# Altium PCB AD9837Final.PcbDoc
Units mm, origin at the board's own origin, x right, y up, seen from the top; angles counter-clockwise.
Board outline 23.2 x 28.1 mm, 2 copper layers (Top Layer, Bottom Layer); 12 components, 11 nets, 51 pads, 5 vias.
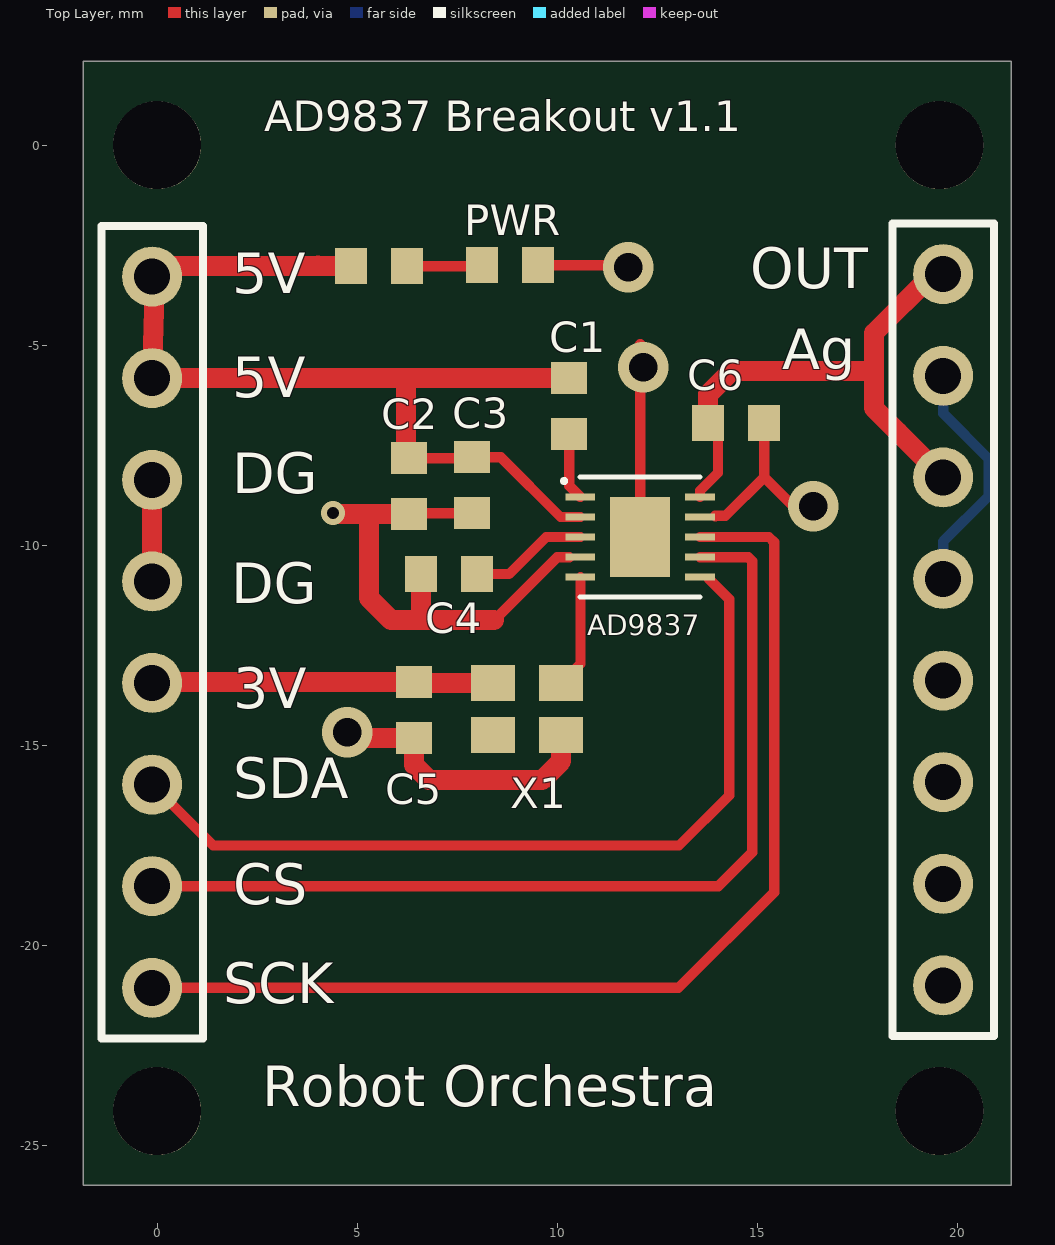
[diagram p0: Top Layer view]
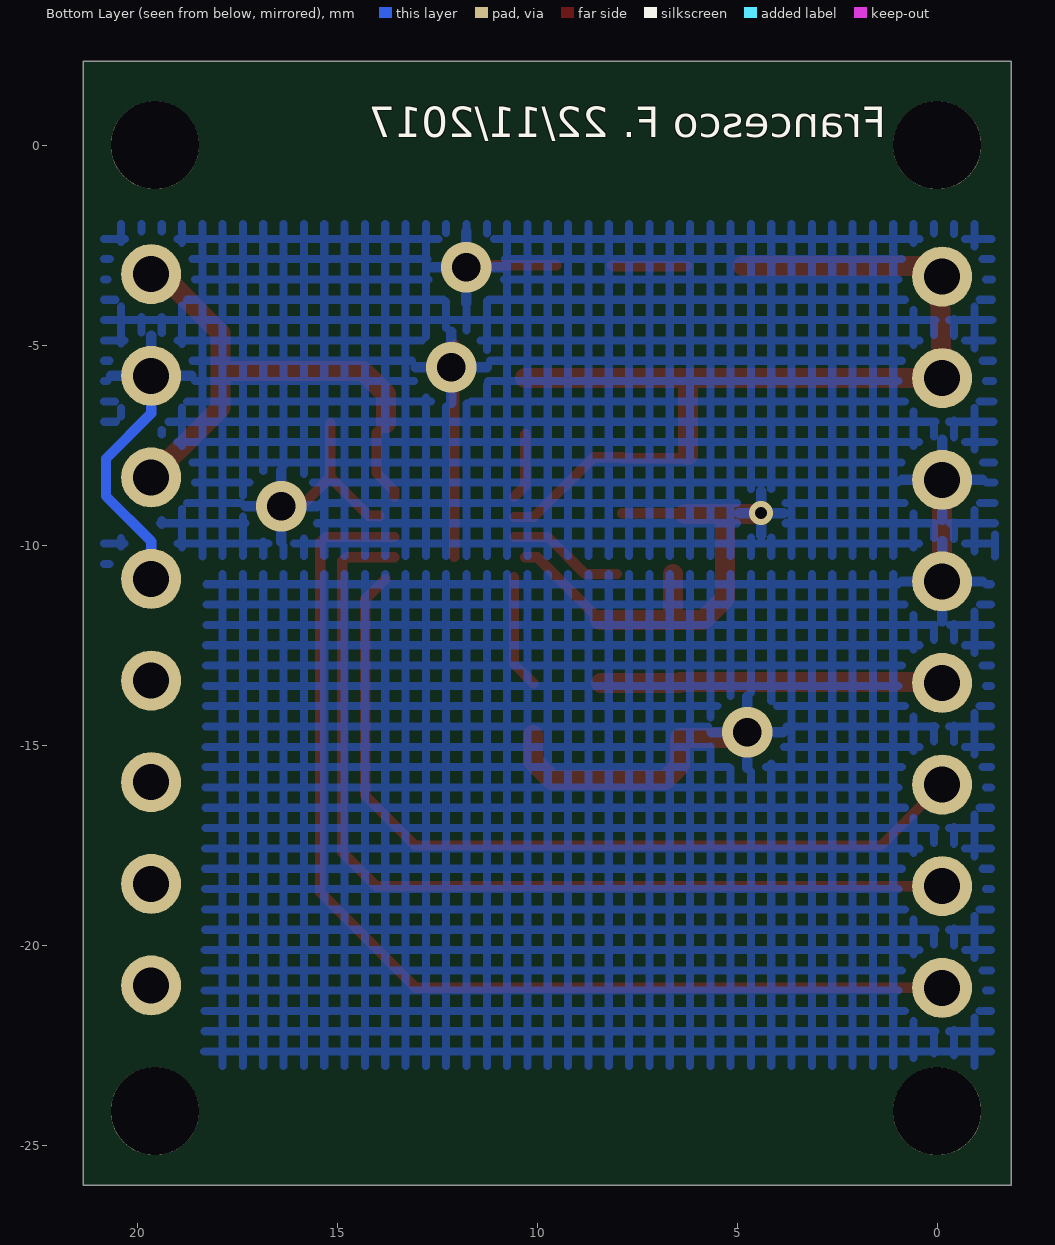
[diagram p1: Bottom Layer view, seen from below]

## Layer stack, top to bottom
Top Solder: solder mask 0.0102, Solder Resist, Dk 3.5
Top Layer: signal copper 0.0356
Dielectric 1: dielectric 0.32, FR-4, Dk 4.8
Bottom Layer: signal copper 0.0356
Bottom Solder: solder mask 0.0102, Solder Resist, Dk 3.5

## Board outline
-1.85,2.1 -1.85,-26 21.35,-26 21.35,2.1

## Design rules (kind name [scope] priority, off if disabled: settings)
Clearance [All] p1: gap=0.25
PolygonConnect [All] p1: connectstyle=Relief reliefconductorwidth=0.254 reliefentries=4 polygonreliefangle="90 Angle" airgapwidth=0.254
RoutingVias [All] p1: holewidth=0.711 width=1.27 viastyle="Through Hole" minholewidth=0.711 minwidth=1.27 maxholewidth=0.711 maxwidth=1.27
SolderMaskExpansion [All] p1: expansion=0.102
Width [All] p1: maxlimit=0.5 minlimit=0.25 preferedwidth=0.254
30 further rules are at their usual default settings.

## Classes and differential pairs
component class Sheet1: C1 C2 C3 C4 C5 C6 PWR ""

## Components (designator, comment, footprint, x,y, rotation, side; value= is the part's Value field where it differs from the comment)
B1 "AD9837ACPZ-RL7" SON50P300X300X80-11N 12.075,-9.796 r0 top
C1 "Cap" 1608[0603] 10.3,-6.525 r270 top
C2 "Cap" 1608[0603] 6.3,-8.525 r90 top
C3 "Cap" 1608[0603] 7.875,-8.5 r90 top
C4 "Cap" 1608[0603] 7.3,-10.725 r0 top
C5 "Cap" 1608[0603] 6.425,-14.125 r90 top
C6 "Cap" 1608[0603] 14.475,-6.95 r180 top
P1 "Header 8" HDR1X8 -0.125,-3.285 r270 top
P2 "Header 8" HDR1X8 19.65,-3.225 r270 top
PWR "LED0" 1608[0603] 8.825,-3 r0 top (schematic designator D1)
R1 "Res1" 1608[0603] 5.55,-3.025 r0 top
X1 "XTAL" OSCCC700X500X180-4N 8.4,-14.75 r0 top

## Footprints (in the part's own frame and the unit in brackets; to place one, negate y for a bottom-side part, rotate by r counter-clockwise, add the part's x,y. Pads: shape width x height; smd on the part's side, far side on the other; paste and mask are expansions set on the pad)
1608[0603] [mm] "Chip Capacitor, Body 1.6x0.8mm, IPC High Density"
  rect 0.8x0.9 smd: 1(-0.7,0) 2(0.7,0)
  body extent -0.87,-0.48 0.87,0.48, height 1.3
HDR1X8 [mm] "Connector; Header; 8 Position"
  round 1.5 hole 0.9: 1(0,0) 2(2.54,0) 3(5.08,0) 4(7.62,0) 5(10.16,0) 6(12.7,0) 7(15.24,0) 8(17.78,0)
  silkscreen extent -1.27,-1.27 19.05,1.27
OSCCC700X500X180-4N [mm]
  rect 1.1x0.9 smd: 1(0,0) 2(1.7,0) 3(1.7,1.3) 4(0,1.3)
SON50P300X300X80-11N [mm]
  rect 0.74x0.185 smd: 1(-1.495,1) 2(-1.495,0.5) 3(-1.495,0) 4(-1.495,-0.5) 5(-1.495,-1) 6(1.495,-1) 7(1.495,-0.5) 8(1.495,0) 9(1.495,0.5) 10(1.495,1)
  rect 1.5x2 smd: 11(0,0)
  silkscreen extent -1.95,-1.5 1.5,1.5

## Part data
B1: "AD9837ACPZ-RL7, Frequency Synthesizer 10 bit-Bit 16Msps, 2.3  5.5 V, 10-pin LFCSP WD"
C1 C2 C3 C4 C5 C6: "Capacitor"
P1 P2: "Header, 8-Pin"
PWR: "Typical INFRARED GaAs LED"
R1: "Resistor"
X1: library part CB3LV-5I-50M0000, "SMD Crystal Oscillator 50MHz 3.3V 50pF 4-Pin CSMD T/R"

## Free pads (board coordinates)
  round 2.2 hole 2.2: 2(0,0) 8(19.558,0) 11(0,-24.15) 12(19.558,-24.15)

## Via types
v1: diameter 1.27, hole 0.711, Top Layer to Bottom Layer, 4 vias
v2: diameter 0.6, hole 0.3, Top Layer to Bottom Layer, 1 vias

## Nets (pads, with @x,y where several pads share a name; then routed paths per layer and width w, separated by ;. In a path a pad name is that pad's centre, name@x,y a point inside that pad or via, vN(x,y) a via of type N, cw(c..) or ccw(c..) an arc to the next point about the centre after c; other vN are vias at no path point)
3V3: C5.2 P1.5 X1.4 | length 8.5
  Top Layer w0.254: P1.5 P1.5@-0.105,-13.425 ; C5.2 C5.2@6.45,-13.45
  Top Layer w0.5: P1.5@-0.105,-13.425 C5.2 ; C5.2@6.45,-13.45 X1.4
5V: B1.2 C1.1 C2.2 C3.2 P1.1 P1.2 R1.1 | length 24.9
  Top Layer w0.254: C2.2@6.225,-7.75 C2.2 7.85,-7.825 C3.2 8.588,-7.8 10.084,-9.296 B1.2
  Top Layer w0.5: 4.025,-3.01 4.01,-3.025 ; R1.1 4.01,-3.025 ; C2.2@6.225,-7.75 6.225,-5.825 ; C1.1 6.225,-5.825 ; 4.01,-3.025 0.204,-3.025 -0.057,-3.287 P1.2 6.225,-5.825
AGND: B1.4 B1.9 B1.11 C2.1 C3.1 C4.1 C5.1 C6.1 P1.3 P1.4 P2.2 P2.4 PWR.2 X1.2 | length 40.9
  Top Layer w0.254: v2(4.4,-9.2) v2@4.425,-9.225 ; v1(4.75,-14.675) v1@4.9,-14.825 ; C2.1 6.325,-9.2 C3.1 ; 8.425,-11.875 10,-10.3 B1.4@10.3,-10.3 ; PWR.2 11.725,-3 v1(11.775,-3.05) ; B1.11@12.075,-10.296 B1.11 12.075,-4.975 12.15,-5.05 v1(12.15,-5.55) ; 13.95,-9.275 13.95,-9.265 14.21,-9.265 15.175,-8.3 ; C6.1 15.175,-8.3 ; v1@16.375,-9 v1(16.4,-9.025) 15.9,-9.025 15.175,-8.3
  Top Layer w0.5: P1.4 P1.3 ; v2@4.425,-9.225 5.3,-9.225 ; v1@4.9,-14.825 C5.1 6.425,-15.5 6.8,-15.875 9.625,-15.875 10.1,-15.4 X1.2 ; C2.1 5.3,-9.225 ; 6.6,-11.75 C4.1 ; 8.425,-11.875 5.85,-11.875 5.3,-11.325 5.3,-9.225
  Bottom Layer w0.254: P2.4 19.65,-9.904 20.781,-8.773 20.781,-7.837 19.65,-6.706 P2.2
CS: B1.8 P1.8 | length 27.2
  Top Layer w0.254: P1.8 13.035,-21.065 15.425,-18.675 15.425,-9.925 15.296,-9.796 B1.8
DATA: B1.6 P1.6 | length 21.2
  Top Layer w0.254: P1.6 1.399,-17.509 13.048,-17.509 14.3,-16.257 14.3,-11.35 B1.6@13.8,-10.85
MCLK: B1.5 X1.3 | length 2.9
  Top Layer w0.254: X1.3 10.58,-12.97 B1.5
Net_1: B1.1 C1.2 | length 1.7
  Top Layer w0.254: C1.2 10.3,-8.516 10.576,-8.792 B1.1@10.58,-8.792
Net_2: PWR.1 R1.2 | length 1.9
  Top Layer w0.254: R1.2 8.1,-3.025 PWR.1
Net_3: B1.3 C4.2 | length 3
  Top Layer w0.25: C4.2 8.799,-10.725 9.726,-9.798 10.508,-9.798 B1.3@10.58,-9.798
OUT: B1.10 C6.2 P2.1 P2.3 | length 14.8
  Top Layer w0.254: B1.10@13.57,-8.79 13.57,-8.64 14.02,-8.19 14.02,-7.195 C6.2 ; P2.3@19.11,-8.45 P2.3@19.453,-8.107 ; P2.3@19.38,-7.98 19.58,-7.98 P2.3@19.453,-8.107 ; P2.1@19.388,-3.225 P2.1 ; P2.3 P2.3@19.453,-8.107
  Top Layer w0.5: C6.2 13.775,-6.225 14.35,-5.65 17.919,-5.65 ; P2.1@19.388,-3.225 17.919,-4.694 17.919,-5.65 ; P2.3@19.453,-8.107 18.519,-7.174 17.919,-6.574 17.919,-5.65
SCK: B1.7 P1.7 | length 24
  Top Layer w0.254: P1.7 14.025,-18.525 14.875,-17.675 14.875,-10.4 14.775,-10.3 B1.7@13.57,-10.3
pads on no net: P2.5 P2.6 P2.7 P2.8 X1.1
copper on no net: | length 56.2
  Top Layer w0.254: -125.9,-16.1 -107.05,-34.95 -77.475,-34.95

## Polygon pours and split planes (outlines as drawn)
AGND on Bottom Layer "DGND" (hatched 90Degree grid 0.508 track 0.203, pour order 12): 18.263,-10.725 -1.35,-10.725 -1.35,-22.775 -1.35,-23.025 18.325,-23.025
AGND on Bottom Layer "DGND" (hatched 90Degree grid 0.508 track 0.203, pour order 16): -1.35,-1.975 20.825,-1.975 20.825,-10.4 20.825,-10.5 -1.45,-10.5

## Silkscreen, mask and mechanical layers (free items; w line width, h text height)
Top Overlay:
  text "AD9837 Breakout v1.1" at 2.675,0.35 h0.76
  text "OUT" at 14.825,-3.575 h1.02
  text "5V" at 1.875,-3.7 h1.02
  text "Ag" at 15.625,-5.6 h1.02
  text "5V" at 1.875,-6.3 h1.02
  text "DG" at 1.875,-8.7 h1.02
  text "DG" at 1.85,-11.45 h1.02
  text "AD9837" at 10.75,-12.25 h0.51
  text "3V" at 1.9,-14.075 h1.02
  text "SDA" at 1.9,-16.325 h1.02
  text "X1" at 8.825,-16.575 h0.76
  text "CS" at 1.9,-18.975 h1.02
  text "SCK" at 1.65,-21.45 h1.02
  text "Robot Orchestra" at 2.625,-24.025 h1.02
Bottom Overlay:
  text "Francesco F. 22/11/2017" at 1.275,0.2 h0.76